# Altium PCB 0.PCB1.PcbDoc (part 4 of 8)
Units mil, origin at the board's own origin, x right, y up, seen from the top; angles counter-clockwise.
Board outline 3897.64 x 3897.64 mil, 6 copper layers (Top Layer, Layer 1, Layer 3, Layer 4, Layer 2, Bottom Layer), stack 60.567 mil thick; 715 components, 563 nets, 2530 pads, 1442 vias.
Unrouted connection lines stored in the file: 6.
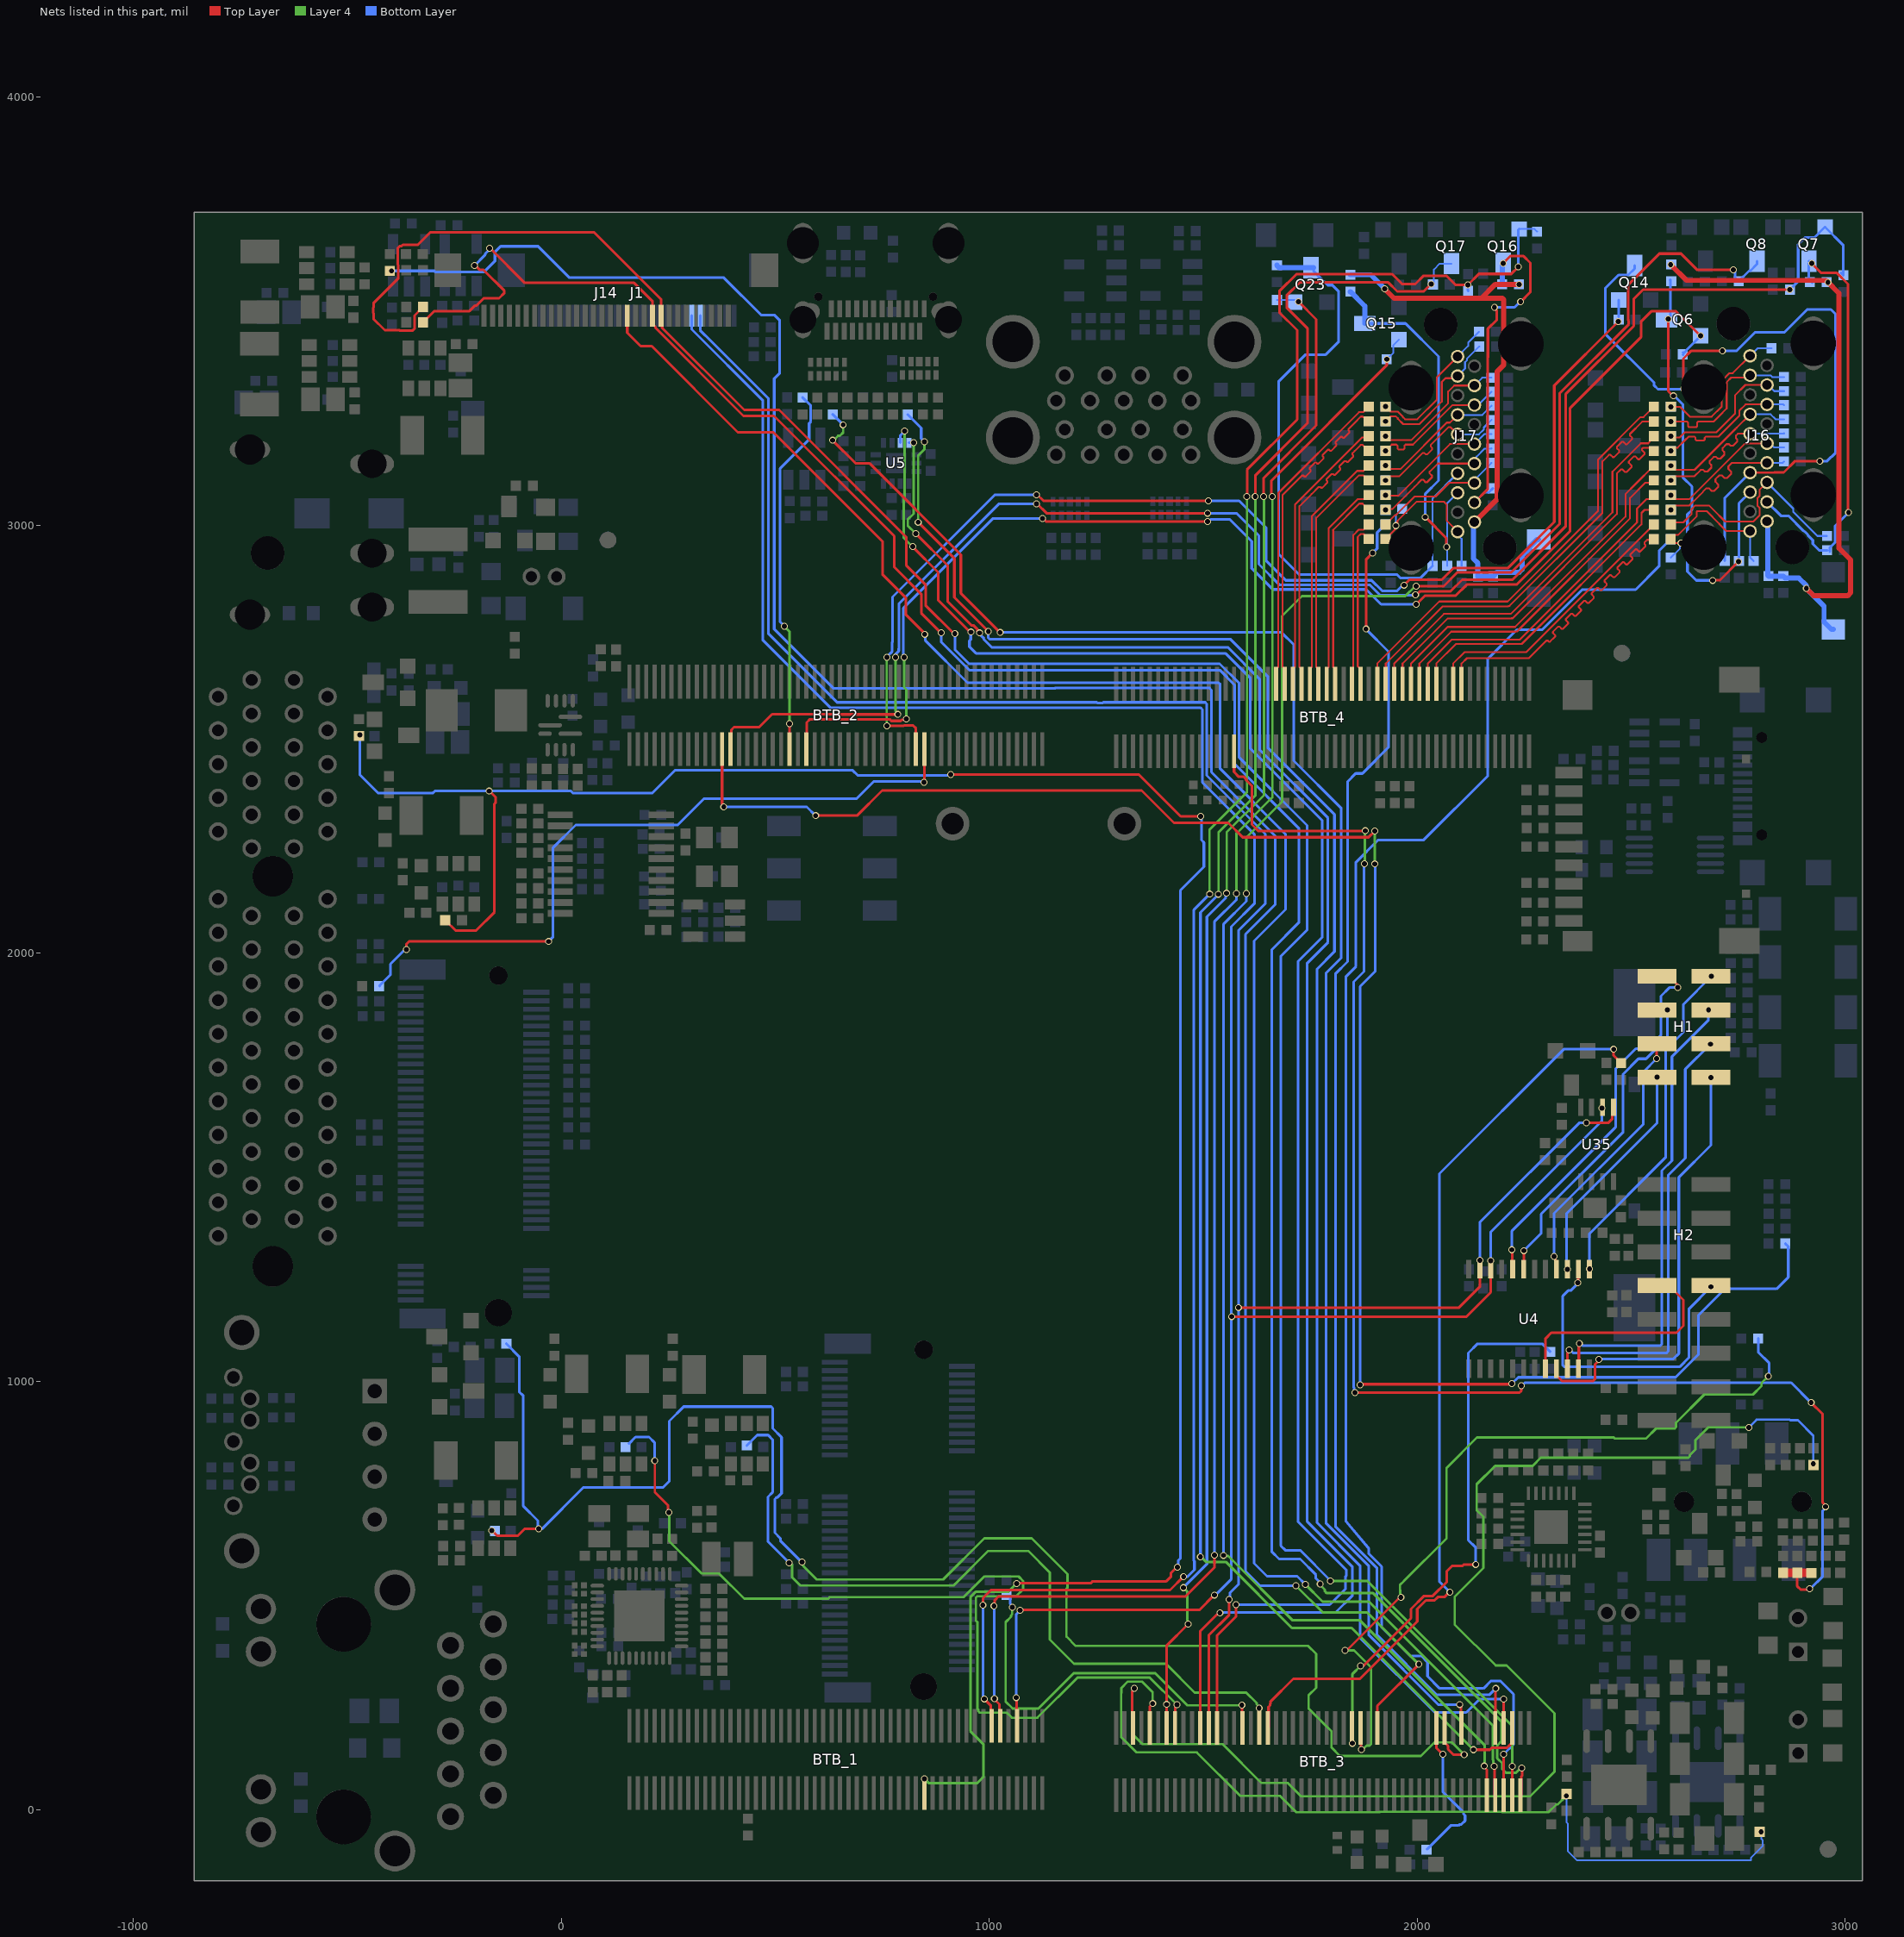
[diagram p8: the nets of this part, all layers, seen from the top]

## Via types
v1: diameter 16.14, hole 11.81, Top Layer to Bottom Layer, tented both sides, 1434 vias
v2: diameter 16.14, hole 11.81, Top Layer to Bottom Layer, 8 vias

## Nets (pads, with @x,y where several pads share a name; then routed paths per layer and width w, separated by ;. In a path a pad name is that pad's centre, name@x,y a point inside that pad or via, vN(x,y) a via of type N, cw(c..) or ccw(c..) an arc to the next point about the centre after c; other vN are vias at no path point) (continued)
GPIO0_A0: BTB_3.3 R120.2 | length 3021.2
  Top Layer w6.16: BTB_3.3@1334,209.4 1334,275.3 1339.4,280.7 v1(1339.4,283.4) ; v1(2925.36,807.88) 2926.01,807.24 R120.2@2926.01,804.64
  Layer 4 w5.61: v1(1339.4,283.4) 1339.4,281.5 1333.5,275.6 1333.5,177.6 1358.3,152.8 1545.3,152.8 1636.2,61.9 1697.9,61.9 1729.1,30.7 2263,30.7 2320.5,88.2 2320.5,224.9 2209.1,336.3 2183.5,336.3 2087.5,432.3 2087.5,496.6 2154.8,563.9 2154.8,683.5 2139.1,699.2 2139.1,759.8 2182.2,802.9 2269.8,802.9 2288.8,821.9 2633.31,821.9 2636.6,825.19 2636.6,828 2649.7,841.1 2649.7,862.5 2679.9,892.7 v1@2775,892.7
  Bottom Layer w5.61: v1(2775,892.6) 2793.17,910.77 2869.83,910.77 2871.5,909.1 2889.7,909.1 2925.36,873.44 v1(2925.36,807.88)
GPIO0_B2: BTB_3.19 R277.2 | length 2160.9
  Top Layer w6.16: BTB_3.19@1650.82,190.65 1652.66,192.49 1652.66,239.26 1656.35,242.95 1656.35,246.45 1656.93,247.03 1656.93,251.43 1710.7,305.2 1866.2,305.2 2000.1,439.1 2000.1,468.46 2020.28,488.64 2040.61,488.64 2048.27,496.3 2063.42,496.3 2074.82,507.7 v1(2076.5,507.7) ; v1(2459.07,1775.9) 2459.07,1761.19 R277.2@2476.5,1743.76
  Bottom Layer w6.16: v1(2076.5,507.7) 2051.9,532.3 2051.9,1485.2 2342.6,1775.9 v1(2459.07,1775.9)
GPIO0_B7: BTB_3.18 R140.2 | length 1852.2
  Top Layer w6.16: v1(1630.6,237.12) 1631.13,221.83 BTB_3.18@1631.13,190.65
  Layer 4 w5.61: v1(532.5,576.3) 535.35,576.3 538.74,572.91 539.8,572.91 539.8,542.28 558.78,523.3 917.2,523.3 997.82,603.92 1091.38,603.92 1141.8,553.5 1141.8,396.7 1198.2,340.3 1413,340.3 1480.2,273.1 1600.2,273.1 1624.81,248.49 1624.81,245.74 1628.96,241.59 1630.6,239.95 v1(1630.6,237.12)
  Bottom Layer w6.16: R140.2@433.9,850.4 458.1,874.6 483.5,874.6 494,864.1 494,740.95 483.1,730.05 483.1,625.7 v1(532.5,576.3)
GPIO0_C6: BTB_3.16 R146.2 | length 933.5
  Top Layer w6.16: v1(1590.28,243.5) 1591.02,242.76 1591.02,191.39 BTB_3.16@1591.76,190.65
  Layer 4 w5.61: v1(1053.78,472.65) 1053.78,456.04 1051.1,453.36 1051.1,450.25 1038.4,437.55 1038.4,252.1 1054.8,235.7 1115.1,235.7 1197.51,318.11 1387.79,318.11 1462.4,243.5 v1(1590.28,243.5)
  Bottom Layer w6.16: R146.2@1045.2,498.5 1048.99,494.71 1048.99,480.14 1053.78,475.35 v1(1053.78,472.65)
GPIO1_A2: BTB_3.55 J14.13 | length 4869.3
  Top Layer w6.16: J14.13@154.5,3489.52 154.5,3449.61 185.76,3418.35 211.55,3418.35 412.7,3217.2 495.8,3217.2 750.64,2962.36 750.64,2885.29 805.2,2830.73 805.2,2791.5 849.24,2747.46 v1(849.24,2745.34) ; v1(2179.9,100.8) 2181.11,99.59 2181.11,34.38 BTB_3.55@2182.31,33.17
  Layer 4 w6.16: v1(1738.49,526.09) 1778.97,485.6 1887.1,485.6 2176.79,195.91 2176.79,115.54 2177.99,114.34 2177.99,102.71 v1(2179.9,100.8)
  Bottom Layer w6.16: v1(849.24,2745.34) 851.15,2743.43 851.15,2730.53 949.45,2632.23 1536.03,2632.23 1539.64,2628.62 1539.64,2431.26 1692.6,2278.3 1692.6,2102.5 1619,2028.9 1619,575 1649.1,544.9 1719.67,544.9 v1(1738.49,526.09)
GPIO1_A4: BTB_3.54 R169.1 | length 3711.4
  Top Layer w6.16: BTB_3.54@2202,33.17 2202.05,33.22 2202.05,128.85 v1(2202.1,128.9)
  Bottom Layer w6.16: v1(2202.1,128.9) 2225.2,152 2225.2,269.3 2193.9,300.6 2172.6,300.6 2154.8,282.8 2052.6,282.8 2024.2,311.2 2024.2,344.3 2009.9,358.6 1983.6,358.6 1917.02,425.18 1917.02,567.38 1886.72,597.68 1886.72,610.25 1885.25,611.97 1833.7,672.54 1833.7,1946.2 1856.9,1969.4 1856.9,2212.9 1909,2265 2015.3,2265 2165,2414.7 2165,2688.3 2232.7,2756 2292,2756 2385.5,2849.5 2510.4,2849.5 2565.1,2904.2 2565.1,2940.33 R169.1@2592.28,2967.51
GPIO1_A7: BTB_3.46 R190.1 | length 3169.9
  Top Layer w6.16: v1(1880.3,2757.6) 1880.3,2919.7 v1(1896,2935.4) ; BTB_3.46@2182.32,190.65 2182.84,191.18 2182.84,282.21 v1(2183.36,282.74)
  Bottom Layer w6.16: v1(1880.3,2757.6) 1933.1,2704.8 1933.1,2481.32 1871.98,2420.2 1856.3,2420.2 1837.3,2401.2 1837.3,1980.6 1808.8,1952.1 1808.8,661.23 1905.5,564.53 1905.5,408.2 2045.9,267.8 2168.43,267.8 v1(2183.36,282.74) ; v1(1896,2935.4) 1906.38,2945.78 1906.38,2982.93 R190.1@1925.49,3002.04
GPIO1_B0: BTB_3.42 R92.2 | length 4163.6
  Top Layer w6.16: v1(633.93,3198.58) 687.6,3144.91 720.19,3144.91 933.8,2931.3 933.8,2841.2 v1(1025.5,2749.5) ; v1(2099.19,245.29) 2099.19,242.59 2102.51,239.26 2102.51,191.72 BTB_3.42@2103.57,190.65
  Layer 4 w5.61: v1(633.93,3198.58) 636.78,3198.58 646.99,3208.8 651,3208.8 658.8,3216.6 v1(658.8,3234.69)
  Bottom Layer w6.16: R92.2@634.57,3258.92 v1(658.8,3234.69) ; v1(1025.5,2749.5) 1682.99,2749.5 1711.5,2720.99 1711.5,2450 1821.9,2339.6 1821.9,1988.9 1787.4,1954.4 1787.4,668.27 1887.1,568.57 1887.1,407.2 2049.01,245.29 v1(2099.19,245.29)
GPIO1_B1: BTB_3.47 R94.2 | length 4158.6
  Top Layer w6.16: v1(834.1,3007.1) 918.7,2922.5 918.7,2831.5 v1(998.1,2752.1) ; BTB_3.47@2202,190.65 v1(2202,258)
  Layer 4 w5.61: v1(834.1,3007.1) 834.1,3162.77 848.7,3177.37 v1(848.7,3195.07)
  Bottom Layer w6.16: R94.2@809.9,3258.42 841.17,3227.15 841.17,3202.6 v1(848.7,3195.07) ; v1(998.1,2752.1) 998.1,2736.98 1001.71,2733.37 1564.34,2733.37 1650.76,2646.96 1650.76,2480.44 1806.75,2324.45 1806.75,2004.05 1765.9,1963.2 1765.9,670.2 1866.3,569.8 1866.3,401.2 2040.8,226.7 2114.7,226.7 2145.64,257.64 2171.33,257.64 2171.69,258 v1(2202,258)
GPIO1_C0: BTB_3.32 R306.1 | length 5661.7
  Top Layer w6.16: R306.1@-400.5,3594.22 v1(-396.18,3594.22) ; BTB_3.32@1906.72,190.65 1906.72,242.02 v1(2004,339.3)
  Layer 4 w6.16: v1(1716.8,522.9) 1779.5,460.2 1883.1,460.2 v1(2004,339.3)
  Bottom Layer w6.16: v1(-396.18,3594.22) -296.37,3594.22 -293.44,3591.29 -180.61,3591.29 -154.68,3617.22 -154.68,3638.34 -141.4,3651.62 -53.92,3651.62 19.35,3578.35 380.05,3578.35 467.1,3491.3 497.95,3491.3 510.65,3478.6 510.65,3355.45 497.8,3342.6 497.8,2757.4 635.75,2619.45 1154.36,2619.45 1155.18,2620.28 1514.05,2620.28 1519.14,2615.19 1519.14,2423.46 1667.84,2274.76 1667.84,2113.64 1598.7,2044.5 1598.7,556.9 1632.7,522.9 v1(1716.8,522.9)
GPIO1_C1: BTB_3.30 R199.1 | length 1818.3
  Top Layer w5.61: v1(1831.7,372) 1835.6,372 1959.32,495.72 v1(1961.91,495.72) ; BTB_3.30@1866.4,190.8 1868.58,188.62 1868.58,141.32 v1(1869.8,140.1)
  Layer 4 w5.61: v1(1831.7,372) 1852.2,372 1892.5,331.7 1892.5,152.9 1888.53,148.93 1881.48,148.93 1872.65,140.1 v1(1869.8,140.1) ; v1(1961.91,495.72) 1960.23,497.4 1960.23,512.21 1959.8,512.64 1959.8,524.6 1969,533.8 ; 1968.9,533.9 2068.7,633.7 2068.7,798.2 2139.5,869 2459.7,869 2461.9,866.8 2534.9,866.8 2557.8,889.7 2601.51,889.7 2604.8,892.99 2604.8,903.7 2670.5,969.4 2784.5,969.4 2804.4,989.3 2804.4,995.8 2820.55,1011.95 v1(2820.55,1012.17)
  Bottom Layer w6.16: R199.1@2796.58,1100.2 2796.58,1068.3 2822.4,1042.48 2822.4,1014.02 v1(2820.55,1012.17)
GPIO1_C6: BTB_3.39 R334.1 | length 361.1
  Top Layer w6.16: BTB_3.39@2044.52,190.65 2044.52,144.08 v1(2059.7,128.9)
  Bottom Layer w6.16: R334.1@2023,-92.7 2078.39,-37.31 2096.47,-37.31 2098.53,-35.25 2102.88,-35.25 2111.75,-26.38 2111.75,-13.82 2108.68,-10.75 2108.68,-7.4 2059.7,41.58 v1(2059.7,128.9)
GPIO1_D3: BTB_3.40 R318.2 R320.1 | length 3888.2
  Top Layer w6.16: v1(-162,651.7) -161.5,651.7 -149.5,639.7 -101.3,639.7 -85.6,655.4 v1(-52.33,655.4) ; BTB_3.40@2064.2,190.65 2064.2,156.2 2071.89,148.52 2071.89,140.81 2085,127.7 v1(2109.8,127.7)
  Layer 4 w5.61: v1(562.4,577.8) 565.5,574.7 565.5,568.5 596.6,537.39 892.49,537.39 988.8,633.7 1099.1,633.7 1183,549.8 1183,518.4 1180.6,516 1180.6,403.7 1202.2,382.1 1745.29,382.1 1763.77,363.62 1763.77,284.27 1746.32,266.82 1746.32,235.69 1788.51,193.5 1799.81,182.2 1799.81,144.69 1819.6,124.9 2008.6,124.9 2040.6,156.9 2080.6,156.9 v1(2109.8,127.7)
  Bottom Layer w6.16: R320.1@-128.12,1088.1 -98.1,1058.08 -98.1,976 -88.4,966.3 -88.4,708.6 -54.5,674.7 -54.5,655.4 -45.1,655.4 51.78,752.28 238.08,752.28 252.75,766.95 252.75,767.85 252.5,768.1 252.5,907.4 286.2,941.1 490.49,941.1 494.1,937.49 494.1,890.3 514.9,869.5 514.9,738.7 505,728.8 502.91,728.8 499.3,725.19 499.3,646.4 512.1,633.6 512.1,628.1 v1(562.4,577.8)
GPIO1_D5: BTB_3.29 R40.2 | length 1292.8
  Top Layer w6.16: v1(1867.68,335.48) 1868.1,335.9 1874.6,335.9 1985.6,446.9 1985.6,468.33 2016.07,498.8 2036.4,498.8 2069.42,531.82 2069.42,557.02 2081.19,568.8 2105.42,568.8 2109.12,572.5 v1(2136.9,572.5)
  Layer 4 w6.16: v1(1848.8,154.7) 1848.8,316.6 v1(1867.68,335.48)
  Bottom Layer w6.16: v1(2136.9,572.5) 2136.9,611.69 2119.5,629.09 2119.5,1066.6 2140.8,1087.9 2292.28,1087.9 R40.2@2311.1,1069.08
GPIO2_C5: BTB_3.8 R221.2 | length 2223.5
  Top Layer w5.61: v1@215,813.7 215.23,813.7 218.8,810.13 218.8,741.5 249.88,710.42 249.88,695.72 v1(251.9,693.7)
  Top Layer w6.16: BTB_3.8@1434.28,190.65 1434.28,239.08 1439.07,243.87 v1(1439.07,244.9)
  Layer 4 w5.61: v1(251.9,693.7) 252.6,693.7 252.6,626.6 327.8,551.4 368.8,551.4 427.8,492.4 623.7,492.4 627.2,495.9 939.9,495.9 988.5,544.5 1068.6,544.5 1079.12,533.98 1079.12,514.12 1063.2,498.2 972.3,498.2 968.83,494.73 968.83,441.24 972.5,437.57 972.5,235.2 974.3,233.4 974.3,229.49 977.59,226.2 1040.9,226.2 1052.8,214.3 1112.5,214.3 1206.7,308.5 1374.8,308.5 1438.4,244.9 v1(1439.07,244.9)
  Bottom Layer w6.16: R221.2@158.4,854.72 173.68,870 205.4,870 218.12,857.28 218.12,838.79 218.8,838.11 v1(218.8,815)
GPIO3_A6: BTB_2.89 R35.1 | length 4289.9
  Top Layer w6.16: BTB_2.89@376.02,2477.17 376.02,2348.78 379.9,2344.9 v1(379.9,2342.2) ; v1(594.59,2321.6) 691.4,2321.6 750.2,2380.4 1356.1,2380.4 1431.77,2304.73 1558.67,2304.73 1592.2,2271.2 1886.52,2271.2 v1(1901.13,2285.8) ; v1(1866.75,992.1) 1868.1,993.45 2219.85,993.45 v1(2221.2,994.8)
  Layer 4 w6.16: v1(1901.1,2208.8) v1@1901.11,2285.79
  Bottom Layer w6.16: v1(379.9,2342.2) 573.99,2342.2 v1(594.59,2321.6) ; v1(1866.75,992.1) 1866.75,1922.65 1901.6,1957.5 1901.6,2208.3 v1(1901.1,2208.8) ; v1(2221.2,994.8) 2236,1009.6 2603.7,1009.6 2656.9,1062.8 2656.9,1154.6 2718.4,1216.1 2839.7,1216.1 2867,1243.4 2867,1315.18 R35.1@2860.18,1322
GPIO3_D5: BTB_3.5 R345.1 R351.1 | length 2069.8
  Top Layer w4: v1(2348.37,31.86) 2348.81,32.3 R345.1@2348.81,36.51
  Top Layer w6.16: BTB_3.5@1375.23,190.65 1375.23,240.73 v1(1381.9,247.4)
  Layer 4 w5.61: v1(1381.9,247.4) 1381.9,273.7 1356.71,298.89 1324.19,298.89 1308.98,283.68 1308.98,272.74 1308.4,272.16 1308.4,169.6 1344.6,133.4 1485.3,133.4 1586.8,31.9 1679.1,31.9 1717.42,-6.42 1912.07,-6.42 1913.27,-5.22 2197.81,-5.22 2199.01,-6.42 2306.38,-6.42 2324.38,11.57 2328.09,11.57 2346.3,29.79 v1@2346.3,30.5
  Bottom Layer w4: v1(2348.37,31.86) 2349,31.23 2349,-30.13 2351.46,-32.59 2351.46,-96.8 2373.75,-119.1 2780.27,-119.1 2780.27,-112.14 2807.51,-84.9 2807.51,-72.18 2803.63,-68.3 v1(2803.63,-52.3)
GPIO4_A3: BTB_2.81 R93.1 | length 867.5
  Top Layer w6.16: BTB_2.81@533.5,2477.17 v1(533.5,2536.4)
  Layer 4 w6.16: v1(521.8,2764.2) 521.8,2763.12 533.5,2751.42 v1(533.5,2536.4)
  Bottom Layer w6.16: v1(521.8,2764.2) 511.72,2774.28 511.72,3132.92 579.35,3200.55 579.35,3238.06 583.18,3241.89 583.18,3279.4 R93.1@564.3,3298.28
GPIO4_B1: BTB_2.65 R137.1 | length 1693.5
  Top Layer w6.16: v1(-361.5,2008.6) -361.5,2021.7 -355.6,2027.6 v1(-29.6,2027.6) ; v1@848.46,2399.9 BTB_2.65@848.46,2477.17
  Bottom Layer w6.16: R137.1@-424.4,1923.6 -424.4,1924.32 -398.86,1949.86 -398.86,1974.84 -367,2006.69 -363.41,2006.69 v1(-361.5,2008.6) ; v1(-29.6,2027.6) -18.8,2038.4 -18.8,2246.79 34.21,2299.8 272.31,2299.8 334.01,2361.5 690.5,2361.5 730.4,2401.4 847.6,2401.4 v1(847.6,2399.9)
GPIO4_C6: BTB_1.65 R251.2 R256.1 | length 5463.4
  Top Layer w6.16: R256.1@-472.35,2507.89 R256.1@-472.35,2507.89 v1(-470.3,2510) ; R251.2@-270.94,2077.4 -246.54,2053 -198.9,2053 -155.8,2096.1 -155.8,2349.2 -153.5,2351.5 -153.5,2365.22 -167.28,2379 v1(-168.04,2379) ; v1(909.9,2417.3) 1350,2417.3 1447.42,2319.88 v1(1494.18,2319.88) ; v1(1064.24,527.82) 1064.8,528.38 1237.18,528.38 1241.9,533.1 1413.8,533.1 1424.99,544.3 1424.99,553.09 1438.1,566.2 v1(1439.41,566.2)
  Layer 4 w6.16: v1(848.4,72) 858.4,62 972.7,62 986.4,75.7 986.4,152.7 956,183.1 956,495.9 968.32,508.21 1044.07,508.21 1063.68,527.82 v1(1064.24,527.82)
  Bottom Layer w6.16: v1(-470.3,2510) -470.3,2417 -427.9,2374.6 -299.6,2374.6 -295.2,2379 22.93,2379 27.13,2374.8 213.36,2374.8 265.91,2427.35 681.08,2427.35 692.58,2415.85 908.45,2415.85 v1(909.9,2417.3) ; v1(1439.41,566.2) 1441.32,568.11 1441.32,581.21 1446.7,586.59 1446.7,2147.2 1501.7,2202.2 1501.7,2258.8 1496,2264.5 1496,2318.07 v1(1494.18,2319.88)
GPIO6_A4: H2.2 U4.8 | length 513.1
  Top Layer w6.16: U4.8@2299.79,1029.66 2299.79,1100.19 2313.36,1113.76 2605.76,1113.76 2621.9,1129.9 2621.9,1190.17 2593.5,1218.57 H2.2@2593.5,1226.3
GPIO6_A5: H1.1 U4.9 | length 1031.5
  Top Layer w6.16: U4.9@2325.38,1029.66 2325.38,1013.91 2338.36,1000.92 2410.99,1000.92 2415.13,1005.07 2415.13,1039.13 2424.8,1048.8 v1(2424.8,1051.5) ; H1.1@2686.18,1710.3 v1(2686.28,1710.2)
  Bottom Layer w6.16: v1(2424.8,1051.5) 2425.9,1052.6 2598.8,1052.6 2611.2,1065 2611.2,1476.5 2686.28,1551.58 v1(2686.28,1710.2)
GPIO6_A6: H1.3 U4.10 | length 1041.6
  Top Layer w6.16: U4.10@2350.97,1029.66 2350.97,1066.28 2355.4,1070.71 v1@2355.4,1075.4
  Bottom Layer w6.16: v1(2355.29,1073.3) 2357.29,1073.3 2363.89,1066.7 2583.09,1066.7 2586.7,1070.31 2586.7,1481.8 2626.3,1521.4 2626.3,1729.16 v1(2685.1,1787.96)
GPIO6_A7: H1.5 U4.11 | length 1087.6
  Top Layer w6.16: U4.11@2376.56,1029.66 2377.63,1030.73 2377.63,1087.38 v1(2378.7,1088.45) ; v1(2680.58,1867.78) H1.5@2686.18,1867.78
  Bottom Layer w6.16: v1(2378.7,1088.45) 2381.4,1088.45 2386.39,1083.46 2567.99,1083.46 2571.6,1087.07 2571.6,1492.2 2595.1,1515.7 2595.1,1758.5 2680.58,1843.98 v1(2680.58,1867.78)
GPIO6_B0: H1.7 U4.13 | length 803.5
  Top Layer w6.16: H1.7@2686.18,1946.52 v1(2687.32,1946.52)
  Bottom Layer w6.16: v1(2402.72,1262.51) 2402.15,1263.08 2402.15,1345.15 2580.8,1523.8 2580.8,1774.7 2621.6,1815.5 2621.6,1880.8 v1(2687.32,1946.52)
GPIO6_B1: H2.1 U4.14 | length 737.7
  Top Layer w6.16: v1(2374.78,1230.55) 2375.67,1231.44 2375.67,1261.05 U4.14@2376.56,1261.94 ; v1(2686.3,1221) H2.1@2686.3,1224
  Bottom Layer w6.16: v1(2374.78,1230.55) 2374.78,1228.18 2358.66,1212.06 2352.56,1212.06 2340.14,1199.64 2340.14,1037.61 2343.75,1034 2613,1034 2635.2,1056.2 2635.2,1169.9 v1(2686.3,1221)
GPIO6_B2: H1.2 U4.15 | length 538
  Top Layer w6.16: H1.2@2560.2,1710.3 v1(2560.2,1710.99)
  Bottom Layer w6.16: v1(2350.97,1261.94) 2350.97,1280.37 2349,1282.33 2349,1392.2 2560.2,1603.39 v1(2560.2,1710.99)
GPIO6_B3: H1.4 U4.16 | length 628.9
  Top Layer w6.16: v1(2319.86,1292.34) 2319.86,1289.64 2322.55,1286.95 2322.55,1264.77 U4.16@2325.38,1261.94 ; v1(2559.5,1754.1) 2559.5,1788.34 H1.4@2560.2,1789.04
  Bottom Layer w6.16: v1(2319.86,1292.34) 2319.86,1392.56 2528.36,1601.06 2528.36,1722.96 v1(2559.5,1754.1)
GPIO6_B6: H1.6 U4.19 | length 779.9
  Top Layer w6.16: U4.19@2248.61,1261.94 2248.95,1262.29 2248.95,1305.15 v1(2249.3,1305.5) ; H1.6@2560.2,1867.78 v1(2584.62,1867.78)
  Bottom Layer w6.16: v1(2249.3,1305.5) 2289.6,1345.8 2289.6,1390.9 2481.2,1582.5 2481.2,1718 2516.81,1753.61 2534.61,1753.61 2584.62,1803.62 v1(2584.62,1867.78)
GPIO6_B7: H1.8 U4.20 | length 909.5
  Top Layer w6.16: v1(2221.3,1307.6) 2222.16,1306.74 2222.16,1262.8 U4.20@2223.01,1261.94 ; H1.8@2560.2,1946.52 2587.95,1946.52 2608.8,1925.67 v1(2608.8,1920)
  Bottom Layer w6.16: v1(2221.3,1307.6) 2221.3,1351.7 2463.3,1593.7 2463.3,1729.9 2510.6,1777.2 2537.67,1777.2 2569.47,1809 2569.47,1900.18 2589.29,1920 v1(2608.8,1920)
HDMI0_5V: C141.1 D26.1 D32.2 J16.18 R152.1 R155.1 | length 1589.8
  Top Layer w12: v1(2592.2,3608.81) 2629,3572.01 2955.36,3572.01 v1(2959.7,3567.67) 2985.4,3541.98 2985.4,2946.41 3012.58,2919.23 3012.58,2842.34 3005.55,2835.31 2973.3,2835.31 2972.9,2835.71 2925.9,2835.71 v1(2909.2,2852.41)
  Bottom Layer w12: v1(2592.2,3608.81) 2592.74,3608.81 R152.1@2593.4,3609.47 ; J16.18@2817.14,3009.15 2818.92,3007.37 2818.92,2882.87 D32.2@2820.7,2881.09 2820.75,2881.14 2855.25,2881.14 2859.52,2876.87 2891.35,2876.87 2908.97,2859.25 v1@2908.97,2855.31 ; 2917.55,2844.06 2950.54,2811.07 2950.54,2774.2 2968.16,2756.58 D26.1@2972.1,2756.58
HDMI0_eARC+: C139.2 D30.2 J16.14 | length 538.5
  Top Layer w4.29: C139.2@2592.38,3001.51 2597.61,3006.74 2621.71,3006.74 2641.2,3026.23 2641.2,3037.9 2649.42,3046.12 2681.99,3046.12 2691.03,3037.08 2719.4,3008.71 2785.57,3008.71 2799.66,3022.8 2799.66,3041.06 2795.25,3045.47 2795.25,3063.73 2799.66,3068.15 2799.66,3082.7 J16.14@2817.14,3100.18
  Bottom Layer w4.29: J16.14@2817.14,3100.18 2878.5,3038.82 2878.5,3031.51 2935,2975.01 D30.2@2957.34,2975.01
HDMI0_eARC-: C140.2 D27.2 J16.19 R159.2 | length 382.4
  Top Layer w4.29: v1(2616.15,2958.2) 2612,2958.2 2611.7,2958.5 2601.29,2958.5 C140.2@2592.28,2967.51 2601.93,2977.16 2609.11,2977.16 2653.2,3021.26 2653.2,3031.85 2654.1,3032.75 2676.46,3032.75 2706.15,3003.05 ; 2705.9,3002.8 2722.3,2986.4 J16.19@2777.77,2986.4
  Bottom Layer w4.29: R159.2@2592.6,2924.48 2613.88,2945.76 2613.88,2955.93 v1(2616.15,2958.2) ; J16.19@2777.77,2986.4 2777.77,2924.72 D27.2@2785.9,2916.59
HDMI1_5V: C153.1 D33.1 D39.2 J17.18 R173.1 R176.1 | length 1363.5
  Top Layer w12: v1(1924.01,3552.05) 1945.91,3530.14 2149.81,3530.14 ; J17.18@2133.64,3007.65 2187.21,3061.22 2187.21,3359.24 2202.31,3374.34 2202.31,3527.15 2199.32,3530.14 2149.81,3530.14 ; v1(2237.9,3562.74) 2182.41,3562.74 2149.81,3530.14
  Bottom Layer w12: R173.1@1843.7,3585.14 1891.7,3585.14 1924.01,3552.84 v1(1924.01,3552.05) ; J17.18@2133.64,3007.65 2131.3,3005.31 2131.3,2921.94 2141.9,2911.34 C153.1@2141.9,2880.29 2142.1,2880.5 2176.89,2880.5 2186.24,2889.84 2238.17,2889.84 2245.2,2896.87 2245.2,2928.07 2262.14,2945.01 2262.14,2948.95 2279.76,2966.57 D33.1@2283.7,2966.57
HDMI1_eARC+: C151.2 D37.2 J17.14 | length 311.5
  Top Layer w4.29: C151.2@1926.06,3001.75 1948.44,3024.14 1951.03,3024.14 1994.13,3067.24 2042.89,3067.24 2057.88,3082.22 2075.07,3099.42 2132.9,3099.42 J17.14@2133.64,3098.68
  Bottom Layer w4.29: J17.14@2133.64,3098.68 2133.64,3105.87 D37.2@2173.22,3145.44
HDMI1_eARC-: C152.2 D34.2 J17.19 R180.2 | length 411.6
  Top Layer w4.29: C152.2@1925.96,2967.75 1947.66,2989.45 ; J17.19@2097,2986.1 2093.9,2986.1 2068.8,3011.2 2068.8,3048.6 2062.06,3055.34 1999.06,3055.34 1953.67,3009.96 1953.67,3006.08 1952.2,3004.61 1952.2,2999.53 v1@1953.67,2998.06 ; 1947.66,2989.45 1953.67,2995.46 v1@1953.67,2998.06 ; 1947.66,2989.45 1947.66,2996.87 v1(1949.93,2999.14) 1951.01,2998.06 v1@1953.67,2998.06
  Bottom Layer w4.29: v1(1949.93,2999.14) 1949.93,3023.05 R180.2@1965,3038.12 ; J17.19@2094.27,2984.9 2094.27,2977.54 2103.8,2968.01 D34.2@2103.8,2904.94
HDMI_TX0_CEC_M0: BTB_2.66 Q14.2 R170.2 | length 2849.9
  Top Layer w6.16: v1(761.3,2531.6) 800.1,2531.6 800.95,2532.45 822.15,2532.45 828.78,2525.82 BTB_2.66@828.78,2477.17 ; v1(1110.4,3071.3) 1112.49,3071.3 1126.5,3057.29 1512.11,3057.29 v1(1512.5,3056.9) ; v1(1969,2860.14) 1981.81,2872.95 2003.7,2872.95 2003.75,2872.9 2057.3,2872.9 2084.4,2900 2212.4,2900 2214.75,2902.35 2320.2,3007.8 2320.2,3326.5 v1(2469.6,3475.9)
  Layer 4 w5.61: v1(760.8,2691.8) 760.61,2691.61 760.61,2532.29 v1(761.3,2531.6)
  Bottom Layer w6.16: v1(760.8,2691.8) 760.8,2692.69 773.5,2705.39 773.5,2726.6 774.2,2727.3 774.2,2832.3 1013.21,3071.3 v1(1110.4,3071.3) ; v1(1512.5,3056.9) 1584,3056.9 1647.46,2993.44 1647.46,2916.74 1692.9,2871.3 1893.5,2871.3 1917.82,2846.98 1953.32,2846.98 1966.48,2860.14 v1(1969,2860.14) ; v1(2469.6,3475.9) 2470.62,3476.92 R170.2@2470.62,3480.31 ; R170.2@2470.5,3486.81 Q14.2@2470.5,3526.51
HDMI_TX0_CEC_PORT: D31.2 J16.13 Q14.3 | length 1687.6
  Top Layer w5: J16.13@2784.2,3122.41 2785.1,3123.31 2833.8,3123.31
  Top Layer w6.16: v1(2622.49,3318.62) 2621.7,3319.41 2621.7,3389.31 2639.6,3407.21 2712.9,3407.21 v1(2713,3407.11) ; 2833.8,3123.31 2856.3,3123.31 2882.9,3149.91 2940.36,3149.91 v1(2940.56,3149.71)
  Bottom Layer w6.16: Q14.3@2508,3606.51 2508,3599.51 2493.08,3584.59 2470.48,3584.59 2439.3,3553.41 2439.3,3447.36 2553.6,3333.06 2553.6,3326.41 2562.3,3317.71 2621.58,3317.71 v1(2622.49,3318.62) ; v1(2713,3407.11) 2745.55,3407.11 2789.15,3450.71 2858.1,3450.71 2911.3,3503.91 2966.5,3503.91 2977.4,3493.01 2977.4,3169.41 2957.87,3149.88 2940.73,3149.88 v1(2940.56,3149.71) ; D31.2@2718.5,2917.01 2718.5,3063.54 J16.13@2777.77,3122.81
HDMI_TX0_D0N: BTB_4.37 C136.1 | length 800.3
  Top Layer w4.29: BTB_4.37@2005.15,2629.65 2005.15,2676.92 2079.63,2751.41 2229.6,2751.41 2230.25,2752.06 2233.24,2752.06 2497.19,3016.01 2497.19,3063.65 2533.06,3099.52 2547.79,3099.52 C136.1@2553.02,3104.75
HDMI_TX0_D0N_PORT: C136.2 D50.2 J16.9 R167.1 | length 360.8
  Top Layer w4.29: C136.2@2592.38,3104.75 2602.03,3114.4 2635.64,3114.4 2647.5,3114.4 2662.4,3129.3 2668.42,3129.3 2672.16,3125.57 2678.18,3125.57 2687.21,3134.6 2687.21,3140.62 2683.48,3144.36 2683.48,3150.38 2692.51,3159.41 2698.53,3159.41 2702.27,3155.67 2708.29,3155.67 2717.32,3164.71 2717.32,3170.73 2713.58,3174.47 2713.58,3180.49 2722.62,3189.52 2728.64,3189.52 2732.38,3185.78 2738.4,3185.78 2747.43,3194.82 2747.43,3200.84 2744.79,3203.48 2744.79,3209.5 2749.05,3213.76 2752.99,3213.76 J16.9@2777.77,3213.76
  Bottom Layer w4.29: J16.9@2777.77,3213.76 2855.98,3213.76 D50.2@2856.9,3214.68
  other v1: 2592.38,3104.81
HDMI_TX0_D0P: BTB_4.36 C135.1 | length 837
  Top Layer w4.29: BTB_4.36@1985.46,2629.65 1985.46,2676.92 2071.09,2762.55 2228.9,2762.55 2486.7,3020.35 2486.7,3072.84 2510.12,3096.26 C135.1@2553.02,3139.16
HDMI_TX0_D0P_PORT: C135.2 D51.2 J16.7 R168.1 | length 327.2
  Top Layer w4.29: C135.2@2592.38,3139.16 2602.03,3129.51 2648.05,3129.51 2742.59,3224.05 2742.75,3224.05 2746.19,3227.49 2746.19,3227.64 J16.7@2777.77,3259.23
  Bottom Layer w4.29: J16.7@2777.77,3259.23 2825.58,3259.23 2837.25,3247.56 D51.2@2856.9,3247.56
  other v1: 2592.38,3139.19
HDMI_TX0_D1N: BTB_4.35 C134.1 | length 945.4
  Top Layer w4.29: BTB_4.35@1965.78,2629.65 1965.78,2676.92 2070.77,2781.91 2219.74,2781.91 2220.49,2782.66 2222.94,2782.66 2466.39,3026.11 2466.39,3110.51 2466.39,3120.99 2475.94,3130.54 2479.5,3130.54 2485.9,3124.15 2488.91,3124.15 2500.95,3136.19 2500.95,3139.2 2494.28,3145.87 2494.28,3148.88 2506.32,3160.92 2509.34,3160.92 2516.01,3154.25 2519.02,3154.25 2531.06,3166.3 2531.06,3169.31 2525.21,3175.16 2525.21,3178.72 2527.72,3181.23 2542.28,3181.23 2545.36,3181.23 C134.1@2553.02,3173.57
HDMI_TX0_D1N_PORT: C134.2 D52.2 J16.6 R165.1 | length 329.8
  Top Layer w4.29: v1(2592.38,3173.61) 2599.92,3181.11 2608.1,3181.11 2626.9,3199.91 2633.81,3206.82 2647.82,3206.82 2650.34,3204.31 2650.34,3199.9 2652.46,3197.77 2669.5,3197.77 2671.63,3199.9 2671.63,3204.31 2674.14,3206.82 2703.36,3206.82 2718.43,3221.89 2752.69,3256.15 2752.69,3267.93 2766.98,3282.22 J16.6@2817.14,3282.22
  Bottom Layer w4.29: J16.6@2817.14,3282.22 2855.12,3282.22 D52.2@2856.9,3280.44
HDMI_TX0_D1P: BTB_4.34 C133.1 | length 931.6
  Top Layer w4.29: BTB_4.34@1946.09,2629.65 1946.09,2676.92 2062.12,2792.95 2218.68,2792.95 2456.1,3030.37 2456.1,3125.25 2522.37,3191.52 2539.64,3191.52 2543.36,3195.24 2543.36,3198.33 C133.1@2553.02,3207.99
HDMI_TX0_D1P_PORT: C133.2 D53.2 J16.4 R166.1 | length 347.6
  Top Layer w4.29: v1(2592.38,3208.01) 2595.25,3205.11 2613.5,3205.11 2625.5,3217.11 2699.1,3217.11 2742.4,3260.41 2742.4,3303.31 2766.81,3327.73 J16.4@2817.14,3327.73
  Bottom Layer w4.29: J16.4@2817.14,3327.73 2819.71,3327.73 2834.11,3313.33 D53.2@2856.9,3313.33
HDMI_TX0_D2N: BTB_4.33 C132.1 | length 1016.7
  Top Layer w4.29: BTB_4.33@1926.41,2629.65 1926.41,2676.92 2059.99,2810.51 2212.64,2810.51 2213.69,2811.56 2215.41,2811.56 2432.79,3028.94 2432.79,3146.71 2432.79,3149.09 2448.17,3164.47 2451.73,3164.47 2457.03,3159.16 2460.04,3159.16 2472.09,3171.21 2472.09,3174.22 2466.51,3179.8 2466.51,3182.81 2478.55,3194.85 2481.56,3194.85 2487.14,3189.27 2490.15,3189.27 2502.2,3201.32 2502.2,3204.33 2496.89,3209.63 2496.89,3213.19 2525.78,3242.08 2526.1,3242.4 C132.1@2553.02,3242.4
HDMI_TX0_D2N_PORT: C132.2 D54.2 J16.3 R163.1 | length 367.5
  Top Layer w4.29: v1(2592.38,3242.42) 2606.91,3242.4 2630.35,3242.4 2632.86,3239.89 2632.86,3231.46 2634.99,3229.33 2652.02,3229.33 2654.15,3231.46 2654.15,3239.89 2656.66,3242.4 2692.48,3242.4 2704.2,3254.12 2722.89,3272.81 2722.89,3334.2 2733.65,3344.96 2772.56,3344.96 J16.3@2777.77,3350.17
  Bottom Layer w4.29: J16.3@2777.77,3350.17 2825.66,3350.17 2829.62,3346.21 D54.2@2856.9,3346.21
HDMI_TX0_D2P: BTB_4.32 C131.1 | length 1012.4
  Top Layer w4.29: BTB_4.32@1906.72,2629.65 1906.72,2676.92 2051.65,2821.85 2211.15,2821.85 2422.5,3033.2 2422.5,3153.35 2521.84,3252.69 2528.9,3252.69 C131.1@2553.02,3276.81
HDMI_TX0_D2P_PORT: C131.2 D65.2 J16.1 R164.1 | length 346.5
  Top Layer w4.29: v1(2592.38,3276.81) 2613.7,3276.81 2636.83,3253.68 2687.81,3253.68 2711.61,3277.48 2711.61,3337.48 2729.39,3355.25 2737.38,3355.25 J16.1@2777.77,3395.64
  Bottom Layer w4.29: J16.1@2777.77,3395.64 2795.64,3413.51 D65.2@2827.9,3413.51
HDMI_TX0_D3N: BTB_4.39 C138.1 | length 719.8
  Top Layer w4.29: BTB_4.39@2044.52,2629.65 2044.52,2676.92 2090.46,2722.86 2244.34,2722.86 2523.75,3002.27 2523.75,3005.69 2524.1,3006.04 2524.1,3028.8 2531.04,3035.74 2552.84,3035.74 C138.1@2553.02,3035.92
HDMI_TX0_D3N_PORT: C138.2 D5.2 J16.12 R161.1 | length 360.4
  Top Layer w4.29: C138.2@2592.38,3035.92 2602.03,3045.58 2634.96,3045.58 2659.27,3069.88 2675.84,3086.45 2681.86,3086.45 2688.04,3080.28 2694.06,3080.28 2703.09,3089.31 2703.09,3095.33 2696.92,3101.51 2696.92,3107.53 2705.95,3116.56 2711.97,3116.56 2718.15,3110.39 2724.17,3110.39 2733.2,3119.42 2733.2,3125.44 2727.03,3131.62 2727.03,3137.64 2731.89,3142.51 2735.08,3145.69 J16.12@2817.14,3145.69
  Bottom Layer w4.29: J16.12@2817.14,3145.69 2853.68,3145.69 D5.2@2856.9,3148.91
  other v1: 2592.38,3036.01
HDMI_TX0_D3P: BTB_4.38 C137.1 | length 757.4
  Top Layer w4.29: BTB_4.38@2024.83,2629.65 2024.83,2676.92 2080.62,2732.71 2081.06,2733.15 2240.08,2733.15 2513.46,3006.53 2513.46,3038.99 2535.15,3060.68 2543.36,3060.68 C137.1@2553.02,3070.34
HDMI_TX0_D3P_PORT: C137.2 D14.2 J16.10 R162.1 | length 326.5
  Top Layer w4.29: v1(2592.38,3070.36) 2602.03,3060.68 2635.52,3060.68 2766.03,3191.2 J16.10@2817.14,3191.2
  Bottom Layer w4.29: J16.10@2817.14,3191.2 2824.5,3191.2 2833.91,3181.79 D14.2@2856.9,3181.79
HDMI_TX0_HPD_M0: BTB_3.56 Q8.3 R157.2 | length 4912.3
  Top Layer w6.16: v1(1997.43,2857.8) 2061.87,2857.8 2093.91,2889.84 2219.64,2889.84 2332.5,3002.71 2332.5,3307.7 2494.2,3469.4 2494.2,3478.1 2493.1,3479.2 2493.1,3561.9 2565.6,3634.4 2616.4,3634.4 2654.3,3596.5 v1(2738.7,3596.5) ; v1(2156.7,101.4) 2156.7,98.7 2162.63,92.77 BTB_3.56@2162.63,33.17
  Layer 4 w5.61: v1(1600.8,2139.9) 1600.8,2270.5 1684.5,2354.2 1684.5,2788.2 1730.7,2834.4 1971.81,2834.4 1995.21,2857.8 v1(1997.43,2857.8)
  Layer 4 w6.16: v1(1547.8,593.7) 1549.23,592.27 1558.53,592.27 1708.8,442 1866.3,442 2157.3,151 2157.3,102 v1(2156.7,101.4)
  Bottom Layer w6.16: v1(1547.8,593.7) 1547.8,2068.5 1600.8,2121.5 v1(1600.8,2139.9) ; v1@2742.36,3593.34 2742.36,3578.73 R157.2@2751.08,3570.01 2775.76,3594.69 2778.78,3594.69 2793.7,3609.61 Q8.3@2793.7,3616.61
HDMI_TX0_SBDN: BTB_4.42 C140.1 | length 754.4
  Top Layer w4.29: BTB_4.42@2103.57,2629.65 2103.57,2676.92 2116.26,2689.61 2260.8,2689.61 2284.88,2713.69 2301.45,2730.26 2305.01,2730.26 2307.33,2727.93 2310.35,2727.93 2322.39,2739.98 2322.39,2742.99 2317.22,2748.15 2317.22,2751.16 2329.27,2763.21 2332.28,2763.21 2337.44,2758.04 2340.45,2758.04 2352.5,2770.09 2352.5,2773.1 2347.33,2778.26 2347.33,2781.27 2359.38,2793.32 2362.39,2793.32 2367.55,2788.15 2370.56,2788.15 2382.61,2800.19 2382.61,2803.2 2377.44,2808.37 2377.44,2811.38 2389.48,2823.42 2392.49,2823.42 2397.66,2818.26 2400.67,2818.26 2412.71,2830.3 2412.71,2833.31 2407.55,2838.48 2407.55,2841.49 2419.59,2853.53 2422.6,2853.53 2427.77,2848.37 2430.78,2848.37 2442.82,2860.41 2442.82,2863.42 2437.66,2868.59 2437.66,2871.6 2449.7,2883.64 2452.71,2883.64 2457.88,2878.48 2460.89,2878.48 2472.93,2890.52 2472.93,2893.53 2467.77,2898.7 2467.77,2901.71 2479.81,2913.75 2482.82,2913.75 2487.99,2908.58 2491,2908.58 2503.04,2920.63 2503.04,2923.64 2497.87,2928.8 2497.87,2931.82 2509.92,2943.86 2512.93,2943.86 2518.09,2938.69 2521.11,2938.69 2533.15,2950.74 2533.15,2953.75 2530.82,2956.08 2530.82,2959.63 2533.85,2962.66 2537.2,2966.01 2551.41,2966.01 C140.1@2552.92,2967.51
HDMI_TX0_SBDP: BTB_4.41 C139.1 | length 650.8
  Top Layer w4.29: BTB_4.41@2083.89,2629.65 2083.89,2676.92 2110.49,2703.53 2255.04,2703.53 C139.1@2553.02,3001.51
HDMI_TX0_SCL_M0: BTB_2.79 Q6.2 R151.2 | length 3194
  Top Layer w6.16: BTB_2.79@572.87,2477.17 573.8,2478.1 573.8,2539.39 581.16,2546.75 767.58,2546.75 771.33,2543 792.98,2543 795.67,2545.69 804.69,2545.69 v1(806.6,2547.6) ; v1(1124.4,3016) 1125.51,3016 1133,3008.51 v1(1509.9,3008.51) ; v1(1997.8,2815.3) 2017.9,2835.4 2089.8,2835.4 2115.78,2861.38 2232.12,2861.38 2357.2,2986.47 2357.2,3273.9 2523.5,3440.2 2523.5,3476.4 2546.9,3499.8 2604.81,3499.8 v1(2662.2,3442.41)
  Layer 4 w5.61: v1(801.2,2691.8) 801.2,2621.39 806.6,2615.99 v1(806.6,2547.6)
  Bottom Layer w6.16: v1(801.2,2691.8) 799.1,2693.9 799.1,2701 799.8,2701.7 799.8,2806.7 1009.1,3016 v1(1124.4,3016) ; v1(1509.9,3008.51) 1512.41,3008.51 1517.5,3013.6 1562.2,3013.6 1613.4,2962.4 1613.4,2899.5 1662.8,2850.1 1880.8,2850.1 1915.6,2815.3 v1(1997.8,2815.3) ; R151.2@2620.6,3397.91 R151.2@2621.8,3399.11 ; R151.2@2621.2,3403.71 2624.68,3403.71 2628.9,3407.93 2628.9,3409.11 v1(2662.2,3442.41)
HDMI_TX0_SCL_PORT: D29.2 J16.15 Q6.3 R152.2 | length 1041.9
  Top Layer w6.16: v1(2586.4,3481.71) 2586.4,3313.41 2597.5,3302.3 v1(2598.59,3302.3) ; v1(2689.9,2871.21) 2690.51,2871.82 2707.21,2871.82 v1(2750.8,2915.41)
  Bottom Layer w6.16: v1(2586.4,3481.71) 2584.6,3479.91 Q6.3@2582.2,3479.91 2591.3,3489.01 R152.2@2591.3,3572.89 ; R152.2@2590.5,3572.09 R152.2@2591.3,3572.89 ; R152.2@2591.3,3573.81 R152.2@2591.3,3572.89 ; R152.2@2592,3573.59 R152.2@2591.3,3572.89 ; v1(2598.59,3302.3) 2600.47,3302.3 2621.2,3281.58 2621.2,3111.11 2641.8,3090.51 2641.8,3036.01 2631.3,3025.51 2631.3,2891.71 2651.8,2871.21 v1(2689.9,2871.21) ; D29.2@2751.7,2916.29 2751.7,3051.26 J16.15@2777.77,3077.33
HDMI_TX0_SDA_M0: BTB_2.88 C142.2 Q7.2 R154.2 | length 3864.6
  Top Layer w6.16: BTB_2.88@395.71,2477.17 397.55,2479.01 397.55,2522.05 403.8,2528.3 462.7,2528.3 492.92,2558.52 639.02,2558.52 639.39,2558.15 v1(786.7,2558.15) ; v1(1110.4,3049.7) 1112.49,3049.7 1133.99,3028.2 v1(1509.9,3028.2) ; v1(1996.02,2837.57) 1998.72,2837.57 2007.05,2845.9 2078.2,2845.9 2105.18,2872.88 2222.62,2872.88 2346.6,2996.86 2346.6,3306.15 2506,3465.55 2506,3528.7 2527.83,3550.53 v1(2870.8,3550.53)
  Layer 4 w5.61: v1(781.51,2691.8) 781.51,2566.18 786.7,2561 v1(786.7,2558.15)
  Bottom Layer w6.16: v1(781.51,2691.8) 781.51,2699.03 788.78,2706.29 788.78,2711.32 789.48,2712.02 789.48,2817.02 1022.15,3049.7 v1(1110.4,3049.7) ; v1(1509.9,3028.2) 1577.6,3028.2 1630.1,2975.7 1630.1,2909 1678.84,2860.26 1889.64,2860.26 1913.3,2836.6 1995.04,2836.6 v1(1996.02,2837.57) ; v1(2870.8,3550.53) 2890.12,3569.85 2890.12,3656.13 2906.2,3672.21 2928.1,3672.21 2952.2,3696.31 Q7.2@2953.2,3696.31 ; Q7.2@2952.7,3696.81 Q7.2@2953.2,3696.31 ; R154.2@2990.5,3589.19 R154.2@2995.7,3583.99 2995.7,3653.81 Q7.2@2953.2,3696.31
HDMI_TX0_SDA_PORT: D28.2 J16.16 Q7.3 R155.2 | length 998.3
  Top Layer w6.16: v1(2921.5,3611.91) 2944.1,3589.31 2980.5,3589.31 3006.3,3563.51 3006.3,3031.31 v1(3007.8,3029.81)
  Bottom Layer w6.16: J16.16@2817.14,3054.66 2849.79,3022.01 2867.5,3022.01 2902.36,2987.15 cw(c2876.2,2948.79) 2914.56,2974.95 2924.4,2965.11 2924.4,2956.21 2939.1,2941.51 D28.2@2957.82,2941.51 ; Q7.3@2915.2,3611.91 2915.2,3574.21 R155.2@2923,3566.41 ; Q7.3@2915.2,3616.81 2916.6,3616.81 v1(2921.5,3611.91) ; D28.2@2964.2,2938.61 2964.2,2947.89 2976.22,2959.91 2976.22,2998.23 v1(3007.8,3029.81)
HDMI_TX1_CEC_M0: BTB_3.7 Q23.2 R191.2 | length 3545.8
  Top Layer w6.16: v1(1414.3,245.4) 1414.45,245.25 1414.45,190.8 BTB_3.7@1414.6,190.65 ; v1@1416.7,245.5 1414.3,247.9 1414.3,382.5 v1(1464.8,433) ; v1(1641.1,3066.9) 1641.1,3110.08 1764.1,3233.08 1764.1,3480.83 v1(1722.88,3522.05)
  Layer 4 w5.61: v1(1554.8,2140.3) 1554.8,2282.53 1641.9,2369.63 1641.9,3066.1 v1(1641.1,3066.9)
  Layer 4 w6.16: v1(1453.6,518.2) 1462.89,508.91 1462.89,434.91 v1(1464.8,433)
  Bottom Layer w4: R191.2@1672.5,3526.02 Q23.2@1714.01,3526.02
  Bottom Layer w6.16: v1(1453.6,518.2) 1508.7,573.3 1508.7,2085.47 1552.89,2129.66 1552.89,2138.39 v1(1554.8,2140.3)
HDMI_TX1_CEC_PORT: D38.2 J17.13 Q23.3 R354.2 | length 1507.4
  Bottom Layer w4.29: D38.2@2035.8,2904.99 2035.8,3062.84 J17.13@2094.27,3121.31
  Bottom Layer w6.16: Q23.3@1757.7,3601.44 1757.7,3594.44 1791.19,3560.95 1801.7,3560.95 1816.51,3546.15 1816.51,3428.94 1786.31,3398.74 1738.98,3398.74 1676.72,3336.48 1676.72,2932.08 1724.07,2884.74 1952.94,2884.74 1960.46,2877.22 2008.03,2877.22 D38.2@2035.8,2904.99
  Bottom Layer w12: R354.2@1672.1,3607.32 1677.98,3601.44 Q23.3@1757.7,3601.44
HDMI_TX1_D0N: BTB_4.25 C148.1 | length 558
  Top Layer w4.29: BTB_4.25@1768.93,2629.65 1768.93,2664.1 1764.23,2668.8 1764.23,3017.13 1863.87,3116.77 1874.12,3116.77 1876.25,3114.64 1877.04,3114.64 C148.1@1886.7,3104.99
HDMI_TX1_D0N_PORT: C148.2 D68.2 J17.9 R188.1 | length 340.6
  Top Layer w4.29: C148.2@1926.6,3101.04 1926.6,3105.53 1935.71,3114.64 1958.5,3114.64 1996.33,3152.47 2012.9,3169.04 2016.45,3169.04 2020.04,3165.45 2023.06,3165.45 2035.1,3177.5 2035.1,3180.51 2031.51,3184.1 2031.51,3187.65 2047.08,3203.22 2073.41,3229.56 2076.97,3229.56 J17.9@2094.27,3212.26
  Bottom Layer w4.29: J17.9@2094.27,3212.26 2144.31,3212.26 2155.45,3223.4 2155.45,3227.52 2155.53,3227.6 2155.53,3228.2 D68.2@2173.4,3246.06
  other v1: 1926.18,3104.89
HDMI_TX1_D0P: BTB_4.24 C147.1 | length 575.3
  Top Layer w4.29: BTB_4.24@1749.24,2629.65 1749.24,2664.1 1753.94,2668.8 1753.94,3021.39 1859.61,3127.06 1874.36,3127.06 C147.1@1886.7,3139.4
HDMI_TX1_D0P_PORT: C147.2 D69.2 J17.7 R189.1 | length 311.8
  Top Layer w4.29: C147.2@1926.06,3139.4 1934.12,3131.34 1960.65,3131.34 2069.15,3239.85 2076.39,3239.85 J17.7@2094.27,3257.73
  Bottom Layer w4.29: J17.7@2094.27,3257.73 2152.18,3257.73 D69.2@2173.4,3278.94
  other v1: 1926.18,3139.36
HDMI_TX1_D1N: BTB_4.23 C146.1 | length 670.7
  Top Layer w4.29: BTB_4.23@1729.56,2629.65 1729.56,2664.1 1724.86,2668.8 1724.86,3044.36 1753.33,3072.83 1769.91,3089.41 1773.46,3089.41 1775.19,3087.68 1778.2,3087.68 1790.24,3099.72 1790.24,3102.73 1788.24,3104.73 1788.24,3107.74 1800.29,3119.79 1803.3,3119.79 1805.3,3117.78 1808.31,3117.78 1820.35,3129.83 1820.35,3132.84 1818.35,3134.84 1818.35,3137.85 1830.39,3149.89 1833.41,3149.89 1835.41,3147.89 1838.42,3147.89 1850.46,3159.94 1850.46,3162.95 1848.73,3164.68 1848.73,3168.23 1854.15,3173.65 1868.2,3187.7 1872.81,3187.7 C146.1@1886.7,3173.82
HDMI_TX1_D1N_PORT: C146.2 D70.2 J17.6 R186.1 | length 315.1
  Top Layer w4.29: C146.2@1930.5,3178.26 1940.53,3188.28 1951.49,3188.28 1954,3185.77 1954,3179.41 1956.51,3176.9 1967.49,3176.9 1970,3179.41 1970,3185.77 1972.51,3188.28 1989.89,3188.28 2082.33,3280.72 J17.6@2133.64,3280.72
  Bottom Layer w4.29: J17.6@2133.64,3280.72 2138.85,3285.93 2147.5,3285.93 D70.2@2173.4,3311.83
  other v1: 1926.18,3173.83
HDMI_TX1_D1P: BTB_4.22 C145.1 | length 659.2
  Top Layer w4.29: BTB_4.22@1709.87,2629.65 1709.87,2664.1 1714.57,2668.8 1714.57,3048.62 1870.98,3205.03 1883.5,3205.03 C145.1@1886.7,3208.23
HDMI_TX1_D1P_PORT: C145.2 D71.2 J17.4 R187.1 | length 327.5
  Top Layer w4.29: C145.2@1926.06,3208.23 1935.5,3198.79 1985.84,3198.79 2072.38,3285.32 2072.38,3312.27 2086.34,3326.23 J17.4@2133.64,3326.23
  Bottom Layer w4.29: J17.4@2133.64,3326.23 2152.12,3344.71 D71.2@2173.4,3344.71
  other v1: 1926.18,3208.3
HDMI_TX1_D2N: BTB_4.21 C144.1 | length 763.5
  Top Layer w4.29: BTB_4.21@1690.19,2629.65 1690.19,2664.1 1685.49,2668.8 1685.49,3070.79 1714.05,3099.35 1730.62,3115.92 1734.18,3115.92 1736.13,3113.97 1739.14,3113.97 1751.18,3126.01 1751.18,3129.02 1748.96,3131.25 1748.96,3134.26 1761,3146.3 1764.01,3146.3 1766.24,3144.08 1769.25,3144.08 1781.29,3156.12 1781.29,3159.13 1779.07,3161.36 1779.07,3164.37 1791.11,3176.41 1794.12,3176.41 1796.35,3174.18 1799.36,3174.18 1811.4,3186.23 1811.4,3189.24 1809.18,3191.46 1809.18,3194.48 1821.22,3206.52 1824.23,3206.52 1826.45,3204.29 1829.47,3204.29 1841.51,3216.34 1841.51,3219.35 1839.56,3221.3 1839.56,3224.86 1854.44,3239.74 1868.48,3253.78 1872.96,3253.78 1874.45,3252.29 1877.04,3252.29 C144.1@1886.7,3242.64
HDMI_TX1_D2N_PORT: C144.2 D72.2 J17.3 R184.1 | length 350.2
  Top Layer w4.29: C144.2@1918.53,3250.55 1933.97,3250.55 1937.63,3254.21 1950.38,3254.21 1954.83,3249.76 1954.83,3248.76 1967.25,3236.34 2004.75,3236.34 2057.45,3289.05 2057.45,3334.95 2065.96,3343.46 2089.06,3343.46 J17.3@2094.27,3348.67 ; C144.2@1927.7,3236.34 C144.2@1928.78,3235.27
  Bottom Layer w4.29: J17.3@2094.27,3348.67 2111.75,3366.15 2111.75,3380.66 2116.16,3385.07 2116.16,3388.79 D72.2@2145.02,3417.64
  other v1: 1926.18,3242.77
HDMI_TX1_D2P: BTB_4.20 C143.1 | length 743
  Top Layer w4.29: BTB_4.20@1670.5,2629.65 1670.5,2664.1 1675.2,2668.8 1675.2,3060.83 1675.79,3061.41 1675.79,3073.19 1675.2,3073.77 1675.2,3075.05 1864.22,3264.07 1873.72,3264.07 C143.1@1886.7,3277.05
HDMI_TX1_D2P_PORT: C143.2 D73.2 J17.1 R185.1 | length 356.7
  Top Layer w4.29: C143.2@1916.6,3267.59 1935.52,3267.59 1937.63,3265.49 1955.05,3265.49 1966.11,3254.43 1966.11,3253.44 1971.92,3247.62 2000.08,3247.62 2046.17,3293.72 2046.17,3346.04 J17.1@2094.27,3394.14 ; C143.2@1926.06,3277.05 1926.06,3277.12 v1(1926.18,3277.24)
  Bottom Layer w4.29: J17.1@2094.27,3394.14 2119,3418.87 2119,3426.45 D73.2@2144.5,3451.94
HDMI_TX1_D3N: BTB_4.27 C150.1 | length 476.1
  Top Layer w4.29: BTB_4.27@1808.3,2629.65 1808.3,2664.1 1803.6,2668.8 1803.6,2989.4 1864.73,3050.53 1872.33,3050.53 C150.1@1886.7,3036.16
HDMI_TX1_D3N_PORT: C150.2 D66.2 J17.12 R182.1 | length 333.4
  Top Layer w4.29: C150.2@1926.06,3036.16 1927.62,3037.73 1941.78,3037.73 1993.73,3089.67 2010.3,3106.24 2013.85,3106.24 2019.74,3100.36 2022.75,3100.36 2034.79,3112.4 2034.79,3115.41 2028.91,3121.3 2028.91,3124.85 2048.24,3144.19 2068.11,3144.19 J17.12@2133.64,3144.19
  Bottom Layer w4.29: J17.12@2133.64,3144.19 2138.85,3149.39 2138.85,3160.29 2157.58,3179.02 2173.08,3179.02 D66.2@2173.3,3179.24
  other v1: 1926.18,3035.94
HDMI_TX1_D3P: BTB_4.26 C149.1 | length 491.2
  Top Layer w4.29: BTB_4.26@1788.61,2629.65 1788.61,2664.1 1793.31,2668.8 1793.31,2993.66 1860.47,3060.82 1870.42,3060.82 1870.52,3060.92 1877.04,3060.92 C149.1@1886.7,3070.58
HDMI_TX1_D3P_PORT: C149.2 D67.2 J17.10 R183.1 | length 307.1
  Top Layer w4.29: C149.2@1926.06,3068.84 1955.79,3068.84 2076.65,3189.7 J17.10@2133.64,3189.7
  Bottom Layer w4.29: J17.10@2133.64,3189.7 2157.12,3213.18 D67.2@2173.4,3213.18
  other v1: 1926.18,3070.42
HDMI_TX1_HPD_M0: BTB_3.48 Q17.3 R178.2 | length 4471.9
  Top Layer w6.16: v1(1621.42,3067.32) 1622.2,3068.1 1622.2,3117 1743.5,3238.3 1743.5,3460.1 1695.15,3508.45 1695.15,3536.75 1725.6,3567.2 1932.3,3567.2 1953.1,3546.4 2015.3,3546.4 v1(2032.4,3563.5) ; v1(2131.33,139.63) 2169.66,139.63 2174.23,144.2 2209.85,144.2 2214.21,148.56 2214.21,148.73 2221.69,156.2 BTB_3.48@2221.69,190.65
  Layer 4 w5.61: v1(1535.22,2138.23) 1535.9,2138.9 1535.9,2282.44 1622.2,2368.74 1622.2,3066.54 v1(1621.42,3067.32)
  Layer 4 w6.16: v1(1493.55,589.9) 1495.33,589.9 1506.68,578.55 1552.75,578.55 1707.2,424.1 1846.87,424.1 v1(2131.33,139.63)
  Bottom Layer w4: R178.2@2039,3564.82 2039,3597.64 2052.5,3611.14 Q17.3@2079.8,3611.14
  Bottom Layer w6.16: v1(1493.55,589.9) 1493.55,2095.52 1535.22,2137.2 v1(1535.22,2138.23)
HDMI_TX1_SBDN: BTB_4.30 C152.1 | length 379
  Top Layer w4.29: BTB_4.30@1867.35,2629.65 1867.35,2664.1 1861.06,2670.4 1861.06,2972.76 1867.93,2979.63 1874.72,2979.63 C152.1@1886.6,2967.75
HDMI_TX1_SBDP: BTB_4.29 C151.1 | length 394.7
  Top Layer w4.29: BTB_4.29@1847.67,2629.65 1850.45,2632.43 1850.45,2669.07 1850.77,2669.39 1850.77,2977.02 1863.67,2989.92 1874.86,2989.92 C151.1@1886.62,3001.68
HDMI_TX1_SCL_M0: BTB_1.45 Q15.2 R172.2 | length 3893.8
  Top Layer w6.16: v1(1011.17,475.5) 1013.08,477.41 1013.08,489.18 1021.31,497.41 1458.51,497.41 1526.1,565 v1(1526.1,594.2) ; v1(1012.3,258.7) 1012.3,257.69 1024.04,245.95 1024.04,197.25 BTB_1.45@1025.63,195.65 ; v1(1661.57,3067.3) 1659.66,3069.21 1659.66,3104.26 1928.78,3373.38 v1(1928.78,3387.74)
  Layer 4 w5.61: v1(1577.5,2139.9) 1577.5,2280.06 1661.57,2364.13 v1(1661.57,3067.3)
  Bottom Layer w4: v1(1928.78,3387.74) 1944.23,3403.2 1944.23,3420.68 Q15.2@1957.4,3433.84
  Bottom Layer w6.16: v1(1011.17,475.5) 1011.9,474.78 1011.9,259.1 v1(1012.3,258.7) ; v1(1526.1,594.2) 1526.1,2073.6 1577.5,2125 v1(1577.5,2139.9)
HDMI_TX1_SCL_PORT: D36.2 J17.15 Q15.3 R173.2 | length 951.5
  Top Layer w6.16: v1(2018.91,3019.24) 2067.81,2970.34 2067.81,2950.14 v1(2068.61,2949.34)
  Bottom Layer w4.29: D36.2@2070,2905.29 2070,3051.56 J17.15@2094.27,3075.83
  Bottom Layer w6.16: Q15.3@1877.4,3471.34 1972.6,3471.34 2049.71,3394.24 2049.71,3104.34 2018.91,3073.54 v1(2018.91,3019.24)
  Bottom Layer w12: R173.2@1843.7,3545.78 1877.4,3512.08 Q15.3@1877.4,3471.34
HDMI_TX1_SDA_M0: BTB_1.44 C154.2 Q16.2 R175.2 | length 4699.8
  Top Layer w6.16: v1(985.2,477.4) 985.5,477.7 985.5,493.9 1004.27,512.67 1422.67,512.67 v1(1454.2,544.2) ; v1(988.3,258.4) 1004.1,242.6 1004.1,197.49 BTB_1.44@1005.94,195.65 ; v1(1601.73,3067.3) 1602.5,3068.06 1602.5,3129.9 1719.6,3247 1719.6,3455.7 1678.1,3497.2 1678.1,3546.8 1718,3586.7 1941.5,3586.7 1964.65,3563.55 1995.69,3563.55 2015.14,3583 2068.1,3583 2089.56,3561.54 v1(2118.31,3561.54) 2143.91,3587.14 2219.71,3587.14 v1(2236.11,3603.54)
  Layer 4 w5.61: v1(1514.9,2138.3) 1514.9,2289.3 1602.5,2376.9 1602.5,3066.53 v1(1601.73,3067.3)
  Bottom Layer w4: Q16.2@2238.1,3691.94 2274.08,3691.94 R175.2@2280,3686.02
  Bottom Layer w6.16: v1(985.2,477.4) 985.2,261.5 v1(988.3,258.4) ; v1(1454.2,544.2) 1463.8,544.2 1479.55,559.95 1479.55,579.58 1478.4,580.73 1478.4,2101.8 v1(1514.9,2138.3) ; v1(2118.31,3561.54) 2118.31,3548.15 C154.2@2119,3547.46 ; v1(2236.11,3603.54) 2236.11,3689.95 Q16.2@2238.1,3691.94
HDMI_TX1_SDA_PORT: D35.2 J17.16 Q16.3 R176.2 | length 830.4
  Top Layer w6.16: J17.16@2133.64,3053.16 2164.31,3083.83 2164.31,3391.44 2165.21,3392.34 2165.21,3459.14 2186.01,3479.94 2186.01,3500.84 2180.31,3506.54 v1(2180.31,3509.24) ; v1(2200.6,3611.94) 2217.19,3628.54 2248.51,3628.54 2264.31,3612.74 2264.31,3544.64 v1(2241.61,3521.94)
  Bottom Layer w6.16: J17.16@2133.64,3053.16 2157.78,3077.3 2167.59,3077.3 D35.2@2176.31,3086.02 ; v1(2180.31,3509.24) 2227.31,3509.24 2240.01,3521.94 v1(2241.61,3521.94)
  Bottom Layer w12: R176.2@2198.54,3562.74 2198.54,3609.88 v1(2200.6,3611.94)
HP_BUTTON_DET: BTB_4.86 C121.1 R116.2 R118.1 | length 3487.8
  Top Layer w6.16: BTB_4.86@1572.08,2472.17 1572.08,2423.56 1583.24,2412.4 1595.23,2412.4 1600.35,2407.28 1600.35,2404.54 1613.9,2391 1613.9,2300.8 1628.5,2286.2 1878.35,2286.2 v1(1878.5,2286.35) ; v1(1854.7,973.9) 2239.22,973.9 2242.83,977.51 2242.83,989.53 v1(2242.9,989.6) ; R116.2@2888.01,552.74 2888.01,521.49 2895.5,514 2915.23,514 v1(2916.8,515.57) ; v1(2920.4,950.3) 2947.3,923.4 2947.3,716.8 2954.03,710.08 v1(2954.03,707.37)
  Top Layer w20: R118.1@2854.71,553.02 2854.85,552.88 2887.87,552.88 R116.2@2888.01,552.74 ; R116.2@2888.01,552.74 C121.1@2920.81,552.72
  Layer 4 w6.16: v1(1876.5,2209.3) 1877.5,2210.3 1877.5,2285.35 v1(1878.5,2286.35)
  Bottom Layer w6.16: v1(1854.7,973.9) 1852.79,975.81 1852.79,984.63 1851.6,985.82 1851.6,1933.35 1875.75,1957.5 1875.75,2208.55 v1(1876.5,2209.3) ; v1(2242.9,989.6) 2244.3,989.6 2251.5,996.8 2873.9,996.8 v1(2920.4,950.3) ; v1(2916.8,515.57) 2918.37,515.57 2947.3,544.5 2947.3,697.94 2954.03,704.67 v1(2954.03,707.37)
I2C0_SCL_M2: BTB_1.47 J1.6 U4.22 U35.6 | length 5991.1
  Top Layer w6.16: v1(1063.1,261.4) 1064.05,260.45 1064.05,196.6 BTB_1.47@1065,195.65 ; v1(1072.15,465.56) 1072.69,466.1 1491.1,466.1 v1(1526.05,501.05) ; v1(1566.6,1151.4) 2115.2,1151.4 2171.83,1208.03 U4.22@2171.83,1261.94 v1(2171.83,1281.63)
  Bottom Layer w6.16: J1.6@305.15,3489.66 305.15,3457.85 470.7,3292.3 470.7,2732.36 629.76,2573.3 1494.49,2573.3 1498.1,2569.69 1498.1,2399.2 1620.35,2276.95 1620.35,2116.95 1565.55,2062.15 1565.55,1152.45 v1(1566.6,1151.4) 1565.2,1150 1565.2,537.53 1528.73,501.05 v1(1526.05,501.05) ; v1(1063.1,261.4) 1063.1,455.76 1072.15,464.8 v1(1072.15,465.56) ; v1(2171.83,1281.63) 2171.83,1348.93 2431.3,1608.4 v1(2431.3,1638.52)
I2C0_SDA_M2: BTB_3.12 J1.5 U4.23 U35.5 | length 5577.7
  Top Layer w6.16: BTB_3.12@1513.02,190.65 1513.02,407.12 1560.74,454.84 v1(1560.74,490.55) ; v1(1582.3,1172.6) 2097.8,1172.6 2146.24,1221.04 U4.23@2146.24,1261.94 v1(2146.24,1283.21) ; v1(2395.4,1603.8) 2446.1,1603.8 2455.86,1613.56 2455.86,1637.49 U35.5@2458.69,1640.31
  Bottom Layer w6.16: J1.5@324.84,3489.66 324.84,3455.54 351.95,3428.43 360.82,3419.55 484.6,3295.78 484.6,2746.3 644.6,2586.3 1251.49,2586.3 1252.81,2584.98 1265.36,2584.98 1266.69,2586.3 1504.65,2586.3 1508.26,2582.69 1508.26,2415.54 1645.09,2278.71 1645.09,2115.89 1582.3,2053.1 v1(1582.3,1172.6) 1582.3,525.81 1562.65,506.16 1562.65,492.46 v1(1560.74,490.55) ; v1(2146.24,1283.21) 2146.24,1371.44 2378.6,1603.8 v1(2395.4,1603.8)
I2C1_SCL_M2: BTB_3.13 U5.6 | length 4137.6
  Top Layer w6.16: v1(821.84,2950.09) 821.84,2949.06 880.9,2890 880.9,2824.98 954.38,2751.5 954.38,2750.47 v1(957.67,2750.47) ; BTB_3.13@1532.71,190.65 1532.71,406.81 1576.3,450.4 v1(1576.3,478.5)
  Layer 4 w5.61: v1(802.4,3220) 802.4,3063.6 800.38,3061.58 800.38,2970.52 820.81,2950.09 v1(821.84,2950.09)
  Bottom Layer w6.16: U5.6@792.5,3192.64 792.5,3210.1 v1(802.4,3220) ; v1(957.67,2750.47) 956.98,2749.78 956.98,2733.16 953.9,2730.08 953.9,2715.99 969.09,2700.8 1551.82,2700.8 1610.1,2642.52 1610.1,2478.23 1778.31,2310.02 1778.31,2038.11 1721.6,1981.4 1721.6,672.23 1834.75,559.08 1834.75,546.52 1832.7,544.47 1832.7,515.7 1795.5,478.5 v1(1576.3,478.5)
I2C1_SDA_M2: BTB_3.11 U5.7 | length 4122.9
  Top Layer w6.16: v1(828.8,2980.2) 903,2906 903,2821.9 959.28,2765.62 963.95,2765.62 972.82,2756.75 972.82,2752.08 975.3,2749.6 975.3,2748.7 977.06,2748.7 v1(977.26,2748.5) ; BTB_3.11@1493.34,190.65 1493.34,416.97 1531.31,454.93 1531.83,454.93 1536.3,459.4 v1(1539,459.4)
  Layer 4 w5.61: v1(823.24,3192.64) 823.24,3027.04 810,3013.8 810,2999 v1(828.8,2980.2)
  Bottom Layer w6.16: U5.7@812.19,3192.64 v1(823.24,3192.64) ; v1(977.26,2748.5) 977.26,2745.8 987.94,2735.12 987.94,2732.77 1005.61,2715.1 1557.4,2715.1 1631.74,2640.76 1631.74,2475.96 1791.5,2316.2 1791.5,2025.75 1743.17,1977.43 1743.17,672.43 1848.9,566.7 1848.9,499.9 1809.2,460.2 1539.8,460.2 v1(1539,459.4)
I2C2_SCL_M4: BTB_3.53 J14.9 R26.2 | length 5884.2
  Top Layer w6.16: R26.2@-326.3,3511 -326.3,3506.3 -342.6,3490 -342.6,3459.21 -346.69,3455.12 -377.31,3455.12 -377.89,3455.7 -411.9,3455.7 -438.28,3482.08 -438.28,3495.25 -438.85,3495.82 -438.85,3508.38 -438.28,3508.95 -438.28,3518.75 -381.03,3576 -381.03,3608.04 -381.46,3608.46 -381.46,3647.93 -377.31,3652.08 -372.7,3652.08 -369.96,3654.82 -335.22,3654.82 -305.78,3684.25 77.05,3684.25 233.24,3528.06 J14.9@233.24,3489.52 236.07,3486.7 236.07,3460.93 427.7,3269.3 509.27,3269.3 806.2,2972.37 806.2,2906.7 851.46,2861.44 851.46,2812.86 917.6,2746.72 v1(919.8,2746.72) ; BTB_3.53@2221.68,33.17 2221.99,33.48 2221.99,100.64 v1(2222.3,100.95)
  Layer 4 w6.16: v1(1797.3,534.1) 1882.72,534.1 2222.3,194.52 v1(2222.3,100.95)
  Bottom Layer w6.16: v1(919.8,2746.72) 919.8,2709.7 953.1,2676.4 1538.57,2676.4 1583.92,2631.05 1583.92,2457.68 1742.7,2298.9 1742.7,2054.6 1681.33,1993.23 1681.33,615.97 1691.8,605.5 1726.8,605.5 1797.3,535 v1(1797.3,534.1)
I2C2_SDA_M4: BTB_3.52 J14.10 R25.2 | length 5714.1
  Top Layer w6.16: R25.2@-322.72,3474 -296.27,3500.45 -214.17,3500.45 -201.84,3512.78 -198.4,3512.78 -180.98,3530.2 -145,3530.2 -132.6,3542.6 -132.6,3547.7 -181.39,3596.49 -189.95,3596.49 -199.9,3606.44 v1(-202.6,3606.44) ; v1(-166.88,3647.33) -166.23,3647.33 -85,3566.1 170.3,3566.1 213.55,3522.85 213.55,3469.84 220.26,3463.13 220.26,3461 425.76,3255.5 497.4,3255.5 778.1,2974.8 778.1,2902.4 841.3,2839.2 841.3,2794.9 v1(887.6,2748.6) ; BTB_3.52@2241.37,33.17 2243.21,35.01 2243.21,77.5 2245.5,79.79 2245.5,95.58 v1(2243.98,97.1)
  Layer 4 w6.16: v1(1773.45,527.1) 1773.45,524.4 1784.07,513.78 1784.07,509.93 1788.8,505.2 1897.25,505.2 2197.28,205.18 2197.28,159.68 2186.95,149.35 2186.95,119.75 2198.9,107.8 2198.9,94.3 2207.4,85.8 2230.8,85.8 2242.1,97.1 v1(2243.98,97.1)
  Bottom Layer w6.16: v1(-202.6,3606.44) -177.5,3631.52 -177.5,3634 -166.88,3644.63 v1(-166.88,3647.33) ; v1(887.6,2748.6) 888.35,2747.85 888.35,2726.78 953.53,2661.6 1539.01,2661.6 1573.76,2626.85 1573.76,2442.04 1723.3,2292.5 1723.3,2071.8 1660.5,2009 1660.5,601.7 1677.2,585 1726.6,585 1763.26,548.34 1763.26,540 1773.45,529.8 v1(1773.45,527.1)